# Altium PCB Tsal_PL.PcbDoc
Units mil, origin at the board's own origin, x right, y up, seen from the top; angles counter-clockwise.
Board outline 2297 x 1115 mil, 2 copper layers (Top Layer, Bottom Layer); 26 components, 21 nets, 58 pads, 5 vias.
Unrouted connection lines stored in the file: 13.
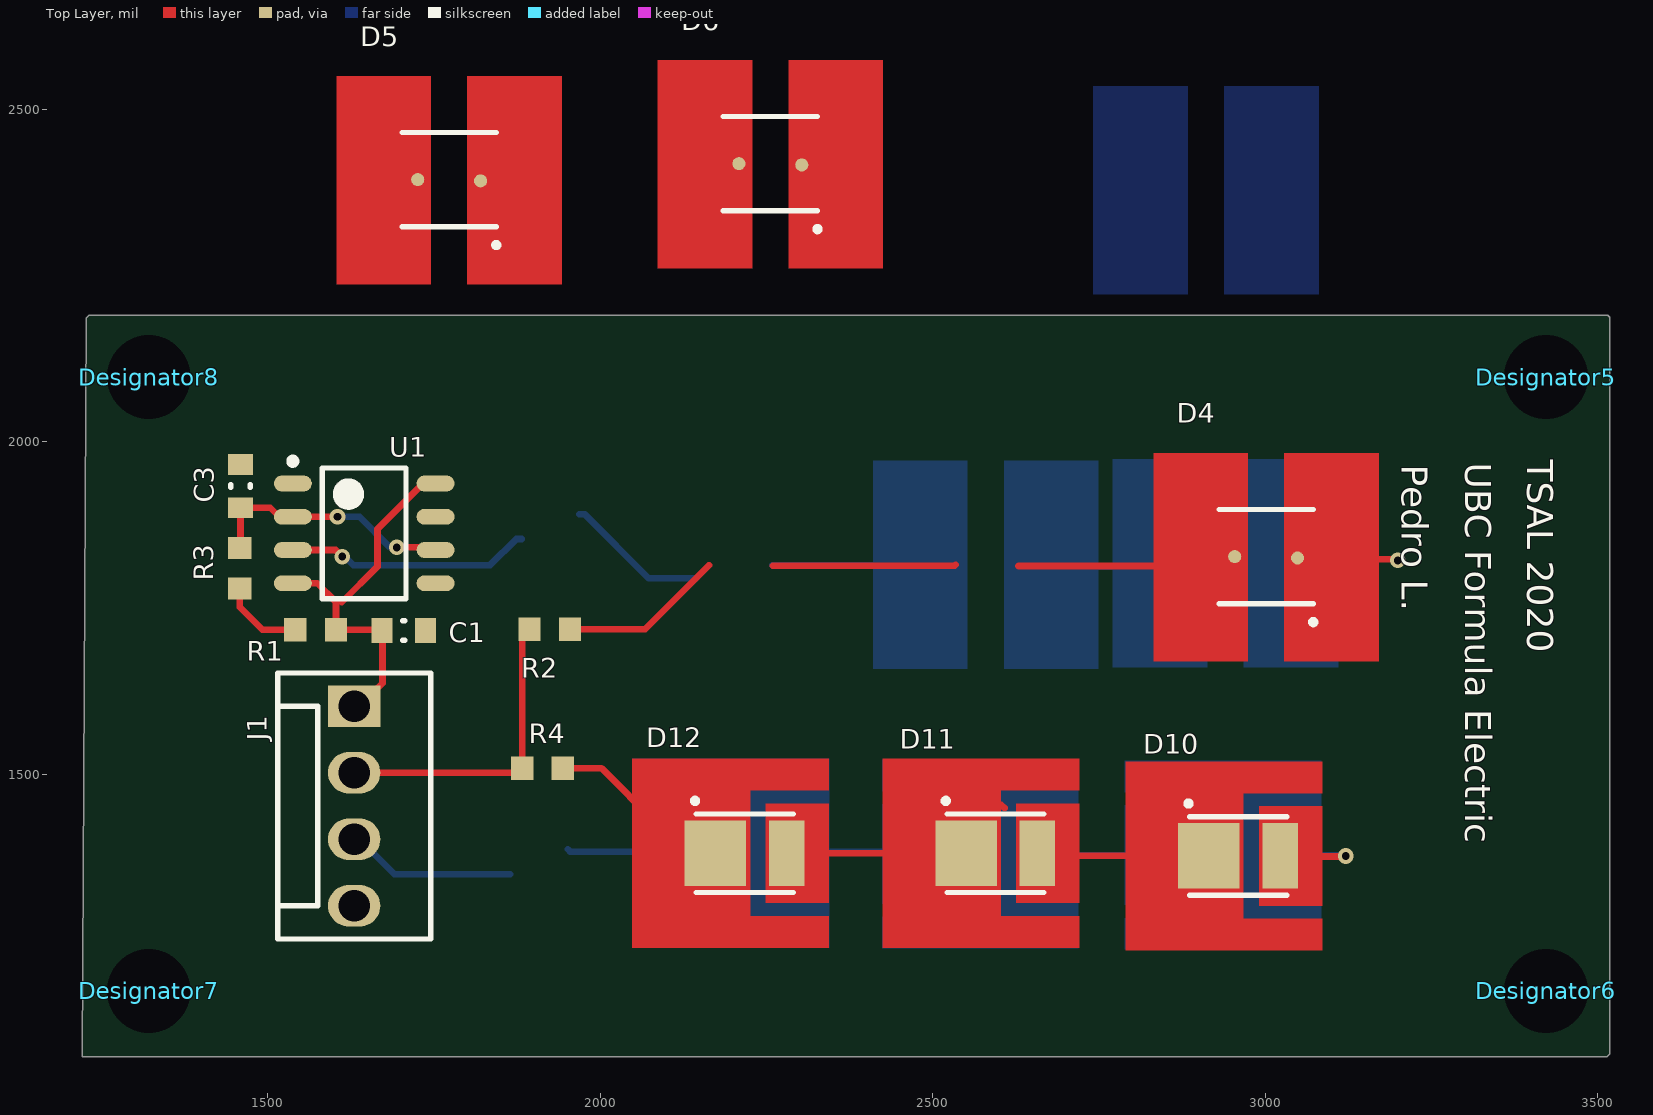
[diagram p0: Top Layer view]
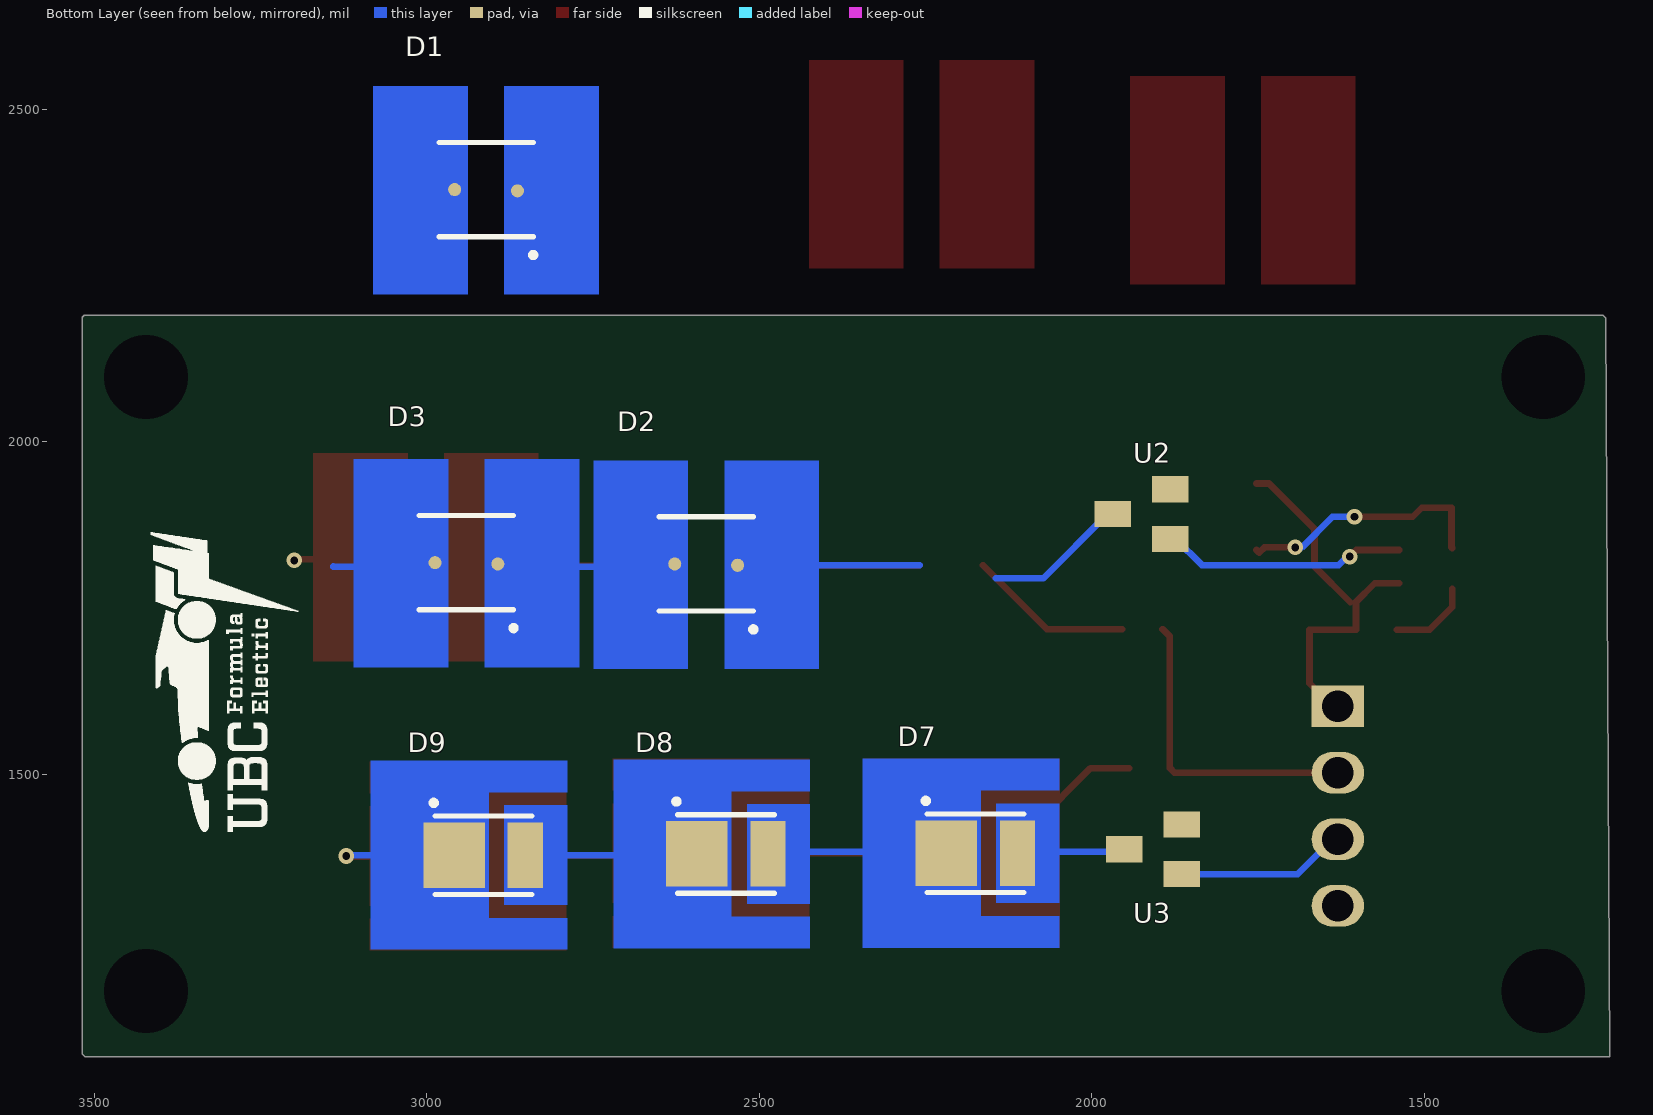
[diagram p1: Bottom Layer view, seen from below]

## Layer stack, top to bottom
Top Solder: solder mask 0.4, Solder Resist, Dk 3.5
Top Layer: signal copper 1.4
Dielectric 1: dielectric 12.6, FR-4, Dk 4.8
Bottom Layer: signal copper 1.4
Bottom Solder: solder mask 0.4, Solder Resist, Dk 3.5

## Board outline
1227,2186 1231,2190 3515,2190 3518,2187 3518,1079 3514,1075 1221,1075

## Design rules (kind name [scope] priority, off if disabled: settings)
Clearance [All] p1: gap=10 ignorepadtopadclearanceinfootprint=FALSE except(0: Arc-Hole Track-Hole SMDPad-Hole THPad-Hole Via-Hole Fill-Hole Poly-Hole Region-Hole Text-Hole)
PolygonConnect [All] p1: connectstyle=Relief reliefconductorwidth=10 reliefentries=4 polygonreliefangle="90 Angle" airgapwidth=10
RoutingVias [All] p1: holewidth=28 width=50 viastyle="Through Hole" minholewidth=28 minwidth=50 maxholewidth=28 maxwidth=50
SolderMaskExpansion [All] p1: expansion=4 istentingtop=FALSE
Width [All] p1: maxlimit=10 minlimit=10 preferedwidth=10
30 further rules are at their usual default settings.

## Classes and differential pairs
component class TSAL_PL: C1 C3 D1 D2 D3 D4 D5 D6 D7 D8 D9 D10 D11 D12 J1 R1 R2 R3 R4 U1 U2 U3

## Components (designator, comment, footprint, x,y, rotation, side; value= is the part's Value field where it differs from the comment)
C1 "0603" "0603 CAPACITOR (TDK C-SERIES)" 1704.52,1716 r0 top
C3 "0603" "0603 CAPACITOR (TDK C-SERIES)" 1459,1933 r90 top
D1 "RED" "RED LED" 2910.76,2379 r270 bottom
D2 "RED" "RED LED" 2579.76,1816 r270 bottom
D3 "RED" "RED LED" 2940.24,1817.97 r270 bottom
D4 "RED" "RED LED" 3001.24,1827 r270 top
D5 "RED" "RED LED" 1772.76,2393.97 r270 top
D6 "RED" "RED LED" 2255.76,2417.97 r270 top
D7 "GREEN" "GREEN LED" 2210.14,1381 r0 bottom
D8 "GREEN" "GREEN LED" 2585.14,1380 r0 bottom
D9 "GREEN" "GREEN LED" 2950,1378 r0 bottom
D10 "GREEN" "GREEN LED" 2923.86,1377 r180 top
D11 "GREEN" "GREEN LED" 2558.86,1381 r180 top
D12 "GREEN" "GREEN LED" 2181.86,1381 r180 top
Designator5 "Comment" "M3 Mounting Holes"#1 3422,2097 r0 top
Designator6 "Comment" "M3 Mounting Holes"#2 3423,1174 r0 top
Designator7 "Comment" "M3 Mounting Holes"#3 1303,1159 r0 top
Designator8 "Comment" "M3 Mounting Holes"#4 1321,2106 r0 top
J1 "1x4 Header" HDR1x4 1630,1452 r0 top
R1 "0603" "0603 RESISTOR (YAGEO)" 1572,1717 r0 top
R2 "0603" "0603 RESISTOR (YAGEO)" 1924,1718 r180 top
R3 "0603" "0603 RESISTOR (YAGEO)" 1458,1809.49 r270 top
R4 "0603" "0603 RESISTOR (YAGEO)" 1913,1509 r180 top
U1 "555" SOIC-8 1645,1862 r0 top
U2 "2N7002ET1G" 2N7002ET1G 1925,1891 r90 bottom
U3 "2N7002ET1G" 2N7002ET1G 1908,1387 r90 bottom

## Footprints (in the part's own frame and the unit in brackets; to place one, negate y for a bottom-side part, rotate by r counter-clockwise, add the part's x,y. Pads: shape width x height; smd on the part's side, far side on the other; paste and mask are expansions set on the pad)
2N7002ET1G [mm]
  rect 1x1.4 smd: 1(-0.95,-1.1) 2(0.95,-1.1) 3(0,1.1)
  body extent -1.5,-1.4 1.55,1.24, height 1.12
"0603 CAPACITOR (TDK C-SERIES)" [mm] "Chip Capacitor, 2-Leads, Body 1.60x0.80mm, IPC Medium Density"
  rect 0.8x0.95 smd: 1(-0.825,0) 2(0.825,0)
  silkscreen extent -0.05,-0.38 0.05,0.38, body extent -0.85,-0.45 0.85,0.45, height 0.9
"0603 RESISTOR (YAGEO)" [mm] "Chip Resistor, 2-Leads, Body 1.60x0.80mm, IPC Medium Density"
  rect 0.85x0.9 smd: 1(-0.775,0) 2(0.775,0)
  body extent -0.85,-0.45 0.85,0.45, height 0.55
"GREEN LED" [mm]
  rect 1.35x2.5 smd: 1(-2.5,0)
  rect 2.35x2.5 smd: 2(0.225,0)
  Top Layer region: -4.1,-1.9 -1.7,-1.9 -1.7,-1.25 -1.7,1.25 -1.7,1.9 -4.1,1.9
  Top Layer region: -4.1,-3.6 -4.1,-2.4 -1.1,-2.4 -1.1,-1.25 -1.1,1.25 -1.1,2.4 -4.1,2.4 -4.1,3.6 3.4,3.6 3.4,-3.6
  silkscreen extent -2.75,-2.07 1.07,1.5, body extent -2.65,-1.35 0.85,1.45, height 0.81
HDR1x4 [mm]
  rect 2x1.6 hole 1.2: 1(0,3.81)
  oval 2x1.6 hole 1.2: 2(0,1.27) 3(0,-1.27) 4(0,-3.81)
  silkscreen extent -2.92,-5.08 2.92,5.08, body extent -2.9,-5.08 2.9,5.08, height 11.07
"M3 Mounting Holes"#1 [mm] "No plating mechanical mounting holes"
  rect 0.3x1.3 hole 3.2 unplated: 15(0,0)
"M3 Mounting Holes"#2 [mm] "No plating mechanical mounting holes"
  rect 0.3x1.3 hole 3.2 unplated: 15(-0.025,0)
"M3 Mounting Holes"#3 [mm] "No plating mechanical mounting holes"
  rect 0.3x1.3 hole 3.2 unplated: 15(0.457,0.381)
"M3 Mounting Holes"#4 [mm] "No plating mechanical mounting holes"
  rect 0.3x1.3 hole 3.2 unplated: 15(0,-0.229)
"RED LED" [mm]
  round 0.5 smd: 1(0.05,1.2) 2(0,-1.2)
  Top Layer region: -1.4,0.7 -1.4,1.7 -0.5,1.7 -0.5,2.5 0.5,2.5 0.5,1.7 1.4,1.7 1.4,0.7
  Top Layer region: -1.4,-0.7 -1.4,-1.7 -0.5,-1.7 -0.5,-2.5 0.5,-2.5 0.5,-1.7 1.4,-1.7 1.4,-0.7
  Top Layer region: 4,-0.7 4,-4.3 -3.95,-4.3 -3.95,-0.7
  Top Layer region: 4,0.7 4,4.3 -3.95,4.3 -3.95,0.7
  silkscreen extent -1.8,-1.8 2.57,1.87, body extent -1.8,-1.86 1.7,1.76, height 1.26
SOIC-8 [mm] "SOIC, 8-Leads, Body 4.91x3.90mm, Pitch 1.27mm, IPC Medium Density"
  oval 1.45x0.6 smd: 1(-2.725,1.905) 2(-2.725,0.635) 3(-2.725,-0.635) 4(-2.725,-1.905) 5(2.725,-1.905) 6(2.725,-0.635) 7(2.725,0.635) 8(2.725,1.905)
  silkscreen extent -2.85,-2.5 1.6,2.88, body extent -3,-2.5 3,2.5, height 1.75

## Part data
C1: library part CL10B103KB8NNNC, "Cap Ceramic 0.01uF 50VDC X7R 10% SMD 0603 Paper T/R", Capacitance=10nF, Case Code (Metric)=1608, Dielectric=X7R, Manufacturer=Samsung, Max Operating Temperature=125°C, Min Operating Temperature=-55°C, Package Quantity=1, Supplier Part Number 1=1276-1009-1-ND, Tolerance=10%, Voltage=50V, Case Code (Imperial)=0603, Case/Package=0603, Category="Ceramic Capacitors", ComponentLink1Description=https://datasheet.ciiva.com/15195/getdatasheetpartid-357415-15195721.pdf?src-supplier=Verical, ComponentLink1URL=https://datasheet.ciiva.com/15195/getdatasheetpartid-357415-15195721.pdf?src-supplier=Verical, ComponentLink2Description=https://datasheet.ciiva.com/29198/457455-da-01-en-vs-kondensator-0603-29198644.pdf?src-supplier=Conrad, ComponentLink2URL=https://datasheet.ciiva.com/29198/457455-da-01-en-vs-kondensator-0603-29198644.pdf?src-supplier=Conrad, ComponentLink3Description=https://datasheet.ciiva.com/20173/71-0315-20173334.pdf?src-supplier=Rapid+Electronics, ComponentLink3URL=https://datasheet.ciiva.com/20173/71-0315-20173334.pdf?src-supplier=Rapid+Electronics, Contact Plating=Tin, Depth=0.8mm, Height=0.8mm, Lead Free="Lead Free", Length=1.6mm, Manufacturer Part Number=CL10B103KB8NNNC, Material=Ceramic, Mount="Surface Mount", Packaging="Tape and Reel", Pricing 1="1=0.10000, 10=0.02700, 50=0.01480, 100=0.01210, 500=0.00866, 1000=0.00681 (USD)", Radiation Hardening=No, RoHS=Yes, Stock 1=3003971, Supplier 1=Digi-Key, Thickness=0.035inch, Voltage Rating=50V, Voltage Rating (DC)=50V, Width=0.031inch
C3: library part UMK107ABJ105KAHT, "CAP ,MLCC ,0603,50V ,X5R,1uF 10% ,T&R", Capacitance=1uF, Case Code (Metric)=1608, Dielectric=X5R, Manufacturer="Taiyo Yuden", Max Operating Temperature=85°C, Min Operating Temperature=-55°C, Package Quantity=4000, Ratings=AEC-Q200, Supplier Part Number 1=587-3501-1-ND, Tolerance=10%, Voltage Rating=50V, Case Code (Imperial)=0603, Case/Package=0603, Category="Ceramic Capacitors", ComponentLink1Description=https://datasheet.ciiva.com/18697/mlcc01-hq-e-18697528.pdf?src-supplier=Digi-Key, ComponentLink1URL=https://datasheet.ciiva.com/18697/mlcc01-hq-e-18697528.pdf?src-supplier=Digi-Key, ComponentLink2Description=https://datasheet.ciiva.com/18697/mlcc01-hq-e-18697529.pdf?src-supplier=Digi-Key, ComponentLink2URL=https://datasheet.ciiva.com/18697/mlcc01-hq-e-18697529.pdf?src-supplier=Digi-Key, ComponentLink3Description=https://datasheet.ciiva.com/18697/mlcc01-hq-e-18697530.pdf?src-supplier=Digi-Key, ComponentLink3URL=https://datasheet.ciiva.com/18697/mlcc01-hq-e-18697530.pdf?src-supplier=Digi-Key, Halogen Free="Halogen Free", Height=0.8mm, Lead Free="Lead Free", Length=0.063inch, Manufacturer Part Number=UMK107ABJ105KAHT, Mount="Surface Mount", Packaging="Tape and Reel", Pricing 1="1=0.18000, 10=0.12600, 50=0.07560, 100=0.06380, 500=0.04368, 1000=0.03864 (USD)", RoHS=Yes, Stock 1=36801, Supplier 1=Digi-Key, Termination=SMD/SMT, Thickness=0.035inch, Voltage Rating (DC)=50V, Width=0.8mm
D1 D2 D3 D4 D5 D6: library part OVS5MRBCR4, "LED 0.33W RED WTR CLR 3.5MM", Case/Package=SMD/SMT, Color=Red, Forward Current=200mA, Forward Voltage=2.2V, Manufacturer="TT Optek", Max Operating Temperature=100°C, Max Power Dissipation=330mW, Min Operating Temperature=-40°C, Package Quantity=1, Power Dissipation=750mW, Power Rating=500mW, Reverse Voltage=12V, Supplier Part Number 1=365-1546-1-ND, Test Current=150mA, Category=LEDs, ComponentLink1Description=https://datasheet.ciiva.com/2126/ovs5mabcr4-2126832.pdf?src-supplier=Digi-Key, ComponentLink1URL=https://datasheet.ciiva.com/2126/ovs5mabcr4-2126832.pdf?src-supplier=Digi-Key, ComponentLink2Description=https://datasheet.ciiva.com/16224/ovs5mrbcr4-16224208.pdf?src-supplier=Future+Electronics, ComponentLink2URL=https://datasheet.ciiva.com/16224/ovs5mrbcr4-16224208.pdf?src-supplier=Future+Electronics, ComponentLink3Description=https://datasheet.ciiva.com/2126/ovs5mabcr4-2126833.pdf?src-supplier=Digi-Key, ComponentLink3URL=https://datasheet.ciiva.com/2126/ovs5mabcr4-2126833.pdf?src-supplier=Digi-Key, ComponentLink4Description=https://datasheet.ciiva.com/46403/ovs5mabcr4-46403613.pdf?src-supplier=Element14, ComponentLink4URL=https://datasheet.ciiva.com/46403/ovs5mabcr4-46403613.pdf?src-supplier=Element14, ComponentLink5Description=https://datasheet.ciiva.com/2126/ovs5mabcr4-2126831.pdf?src-supplier=Digi-Key, ComponentLink5URL=https://datasheet.ciiva.com/2126/ovs5mabcr4-2126831.pdf?src-supplier=Digi-Key, Depth=3.5mm, Dominant Wavelength=625nm, Illumination Color=Red, Lead Free="Lead Free", Length=3.5mm, Lens Style=Clear,Diffused,Colorless, Luminous Intensity=7150mcd, Manufacturer Part Number=OVS5MRBCR4, Max Current Rating=200mA, Mount="Surface Mount", Number of Elements=1, Number of Pins=2, Packaging="Tape and Reel", Pricing 1="1=0.96000, 100=0.92400, 250=0.88000, 500=0.85800 (USD)", REACH SVHC="No SVHC", RoHS=Yes, Stock 1=10132, Supplier 1=Digi-Key, Viewing Angle=120°, Wavelength=625nm
D7 D8 D9 D10 D11 D12: library part XZDG25X109FS, "Led 3.5X2.8 0.5W SMD Green", Case Code (Imperial)=1411, Case Code (Metric)=3528, Color=Green, Forward Voltage=3.5V, Lens Color=Colorless, Manufacturer=SunLED, Supplier Part Number 1=1497-1345-1-ND, Test Current=150mA, Case/Package=1411, Category=LEDs, ComponentLink1Description=http://www.sunledusa.com/products/spec/XZDG25X109FS.pdf?src-supplier=Digi-Key, ComponentLink1URL=http://www.sunledusa.com/products/spec/XZDG25X109FS.pdf?src-supplier=Digi-Key, ComponentLink2Description=https://www.sunledusa.com/products/spec/XZDG25X109FS.pdf?src-supplier=Digi-Key, ComponentLink2URL=https://www.sunledusa.com/products/spec/XZDG25X109FS.pdf?src-supplier=Digi-Key, Dominant Wavelength=525nm, Height=1.05mm, Length=3.5mm, Lens Size=2.5mm, Lens Style=Round,Flat, Lens Transparency=Clear, Luminous Intensity=6990mcd, Manufacturer Part Number=XZDG25X109FS, Mount="Surface Mount", Packaging="Cut Tape", Pricing 1="1=1.83000, 10=1.61300, 100=0.93630, 500=0.84640, 1000=0.72738 (USD)", RoHS=No, Stock 1=1496, Supplier 1=Digi-Key, Viewing Angle=120°, Width=2.8mm
J1: library part 22-27-2041, "Conn Wire to Board HDR 4 POS 2.54mm Solder ST Thru-Hole Bag", Color=Natural, Contact Resistance=10mR, Housing Color=White, Manufacturer=Molex, Max Operating Temperature=75°C, Min Operating Temperature=0°C, Supplier Part Number 1=WM4113-ND, Category="Headers and Wire Housings", ComponentLink1Description=https://datasheet.ciiva.com/6813/022272021-sd-6813678.pdf?src-supplier=Digi-Key, ComponentLink1URL=https://datasheet.ciiva.com/6813/022272021-sd-6813678.pdf?src-supplier=Digi-Key, ComponentLink2Description=https://datasheet.ciiva.com/7844/1625756-7844114.pdf?src-supplier=Element14, ComponentLink2URL=https://datasheet.ciiva.com/7844/1625756-7844114.pdf?src-supplier=Element14, ComponentLink3Description=https://datasheet.ciiva.com/11746/0900766b80462714-11746241.pdf?src-supplier=RSComponents, ComponentLink3URL=https://datasheet.ciiva.com/11746/0900766b80462714-11746241.pdf?src-supplier=RSComponents, ComponentLink4Description=https://datasheet.ciiva.com/20207/22-0838e-20207115.pdf?src-supplier=Rapid+Electronics, ComponentLink4URL=https://datasheet.ciiva.com/20207/22-0838e-20207115.pdf?src-supplier=Rapid+Electronics, ComponentLink5Description=https://datasheet.ciiva.com/15217/getdatasheetpartid-176661-15217685.pdf?src-supplier=Verical, ComponentLink5URL=https://datasheet.ciiva.com/15217/getdatasheetpartid-176661-15217685.pdf?src-supplier=Verical, ComponentLink6Description=https://datasheet.ciiva.com/49385/879300-49385686.pdf?src-supplier=Jameco, ComponentLink6URL=https://datasheet.ciiva.com/49385/879300-49385686.pdf?src-supplier=Jameco, Connector Type="Male Pin", Contact Material=Brass, Contact Mating Length=0.295inch, Contact Plating=Tin,Copper, Depth=5.8mm, Fastening Type=Friction, Gender=Male, Housing Material=Nylon, Length=10.16mm, Manufacturer Part Number=22-27-2041, Mount="Through Hole", Number of Contacts=4, Number of Positions=4, Number of Rows=1, Orientation=Straight, Packaging=Bulk, Pitch=2.54mm, Pricing 1="1=0.40000, 10=0.38300, 100=0.26800, 500=0.22974, 1000=0.19145, 5000=0.16410, 10000=0.15316 (USD)", RoHS=Yes, Stock 1=5089, Supplier 1=Digi-Key, Termination=Solder
R1: library part CRCW060322K0FKEAC, "Res Thick Film 0603 22K Ohm 1% 1/10W ±100ppm/°C Molded SMD Paper T/R", Case/Package=Molded, Manufacturer="Vishay Semiconductors", Max Operating Temperature=155°C, Min Operating Temperature=-55°C, Power Rating=100mW, Resistance=22k, Resistor Type="Thick Film", Supplier Part Number 1=541-4036-1-ND, Temperature Coefficient=100ppm/°C, Tolerance=1%, Category=Resistors, ComponentLink1Description=http://www.vishay.com/docs/28773/crcwce3.pdf?src-supplier=Digi-Key, ComponentLink1URL=http://www.vishay.com/docs/28773/crcwce3.pdf?src-supplier=Digi-Key, ComponentLink2Description=http://www.vishay.com/docs/20035/dcrcwe3.pdf?src-supplier=Avnet+Asia, ComponentLink2URL=http://www.vishay.com/docs/20035/dcrcwe3.pdf?src-supplier=Avnet+Asia, Contact Plating=Tin, Lead Free="Lead Free", Length=1.55mm, Manufacturer Part Number=CRCW060322K0FKEAC, Mount="Surface Mount", Pricing 1="1=0.10000, 10=0.03100, 100=0.01260, 1000=0.00567, 2500=0.00492 (USD)", RoHS=Yes, Stock 1=48223, Supplier 1=Digi-Key, Termination=Wraparound
R2: library part 2010, "TE CONNECTIVITY - CRGP2010F100R - RES, 100R, 1%, 1.25W, 2010, THICK FILM", Manufacturer="TE Connectivity", Manufacturer Part Number=CRGP2010F100R, Resistence=100, Supplier Part Number 1=A130648CT-ND, Category="Chip SMD Resistors", ComponentLink1Description=https://www.te.com/commerce/DocumentDelivery/DDEController?Action=srchrtrv&amp;DocNm=9-1773463-9&amp;DocType=DS&amp;DocLang=English&src-supplier=Digi-Key, ComponentLink1URL=https://www.te.com/commerce/DocumentDelivery/DDEController?Action=srchrtrv&amp;DocNm=9-1773463-9&amp;DocType=DS&amp;DocLang=English&src-supplier=Digi-Key, ComponentLink2Description=https://4donline.ihs.com/images/VipMasterIC/IC/TYEL/TYEL-S-A0005460475/TYEL-S-A0005460475-1.pdf?hkey=52A5661711E402568146F3353EA87419&src-supplier=Farnell, ComponentLink2URL=https://4donline.ihs.com/images/VipMasterIC/IC/TYEL/TYEL-S-A0005460475/TYEL-S-A0005460475-1.pdf?hkey=52A5661711E402568146F3353EA87419&src-supplier=Farnell, ComponentLink3Description=https://4donline.ihs.com/images/VipMasterIC/IC/TYEL/TYEL-S-A0005460475/TYEL-S-A0005460475-1.pdf?hkey=52A5661711E402568146F3353EA87419&src-supplier=Newark, ComponentLink3URL=https://4donline.ihs.com/images/VipMasterIC/IC/TYEL/TYEL-S-A0005460475/TYEL-S-A0005460475-1.pdf?hkey=52A5661711E402568146F3353EA87419&src-supplier=Newark, Pricing 1="1=0.37000, 10=0.28600, 100=0.12040, 1000=0.06643 (USD)", RoHS=No, Stock 1=14514, Supplier 1=Digi-Key
R3: library part CRCW0603200KFKEAC, "Res Thick Film 0603 200K Ohm 1% 1/10W ±100ppm/°C Molded SMD Paper T/R", Case/Package=Molded, Manufacturer=Vishay, Max Operating Temperature=155°C, Min Operating Temperature=-55°C, Power Rating=100mW, Resistance=200k, Resistor Type="Thick Film", Supplier Part Number 1=541-4027-1-ND, Temperature Coefficient=100ppm/°C, Tolerance=1%, Category=Resistors, ComponentLink1Description=http://www.vishay.com/docs/28773/crcwce3.pdf?src-supplier=Digi-Key, ComponentLink1URL=http://www.vishay.com/docs/28773/crcwce3.pdf?src-supplier=Digi-Key, Contact Plating=Tin, Lead Free="Lead Free", Length=1.55mm, Manufacturer Part Number=CRCW0603200KFKEAC, Mount="Surface Mount", Pricing 1="1=0.10000, 10=0.03100, 100=0.01260, 1000=0.00567, 2500=0.00492 (USD)", RoHS=Yes, Stock 1=12235, Supplier 1=Digi-Key, Termination=Wraparound
R4: library part RL1220S-270-F, "RES SMD 27 OHM 1% 1/3W 0805", Case/Package=0805, Manufacturer=Susumu, Package Quantity=5000, Resistance=27, Supplier Part Number 1=408-1396-1-ND, Category="Chip SMD Resistors", ComponentLink1Description=http://www.mouser.com/ds/2/392/RL_Data_sheet-263250.pdf?src-supplier=Mouser, ComponentLink1URL=http://www.mouser.com/ds/2/392/RL_Data_sheet-263250.pdf?src-supplier=Mouser, ComponentLink2Description=http://www.susumu.co.jp/common/pdf/n_catalog_partition08_en.pdf?src-supplier=Digi-Key, ComponentLink2URL=http://www.susumu.co.jp/common/pdf/n_catalog_partition08_en.pdf?src-supplier=Digi-Key, Height=0.4mm, Length=2mm, Manufacturer Part Number=RL1220S-270-F, Packaging="Tape and Reel", Pricing 1="1=0.34000, 10=0.28900, 25=0.21000, 50=0.15220, 100=0.11290, 250=0.08664, 500=0.06826, 1000=0.04725 (USD)", RoHS=Yes, Stock 1=2466, Supplier 1=Digi-Key, Termination=SMD/SMT, Weight=0.000194oz, Width=1.25mm
U1: library part SA555DRG4, "IC OSC SGL TIMER 100KHZ 8-SOIC", Case/Package=SOIC, Frequency=100kHz, High Level Output Current=-200mA, Low Level Output Current=200mA, Manufacturer="Texas Instruments", Max Operating Temperature=85°C, Max Supply Voltage=16V, Min Operating Temperature=-40°C, Min Supply Voltage=4.5V, Nominal Supply Current=2mA, Operating Supply Current=10mA, Package Quantity=2500, Quiescent Current=15mA, Supplier Part Number 1=296-48948-1-ND, Category="Timers and Oscillators", ComponentLink1Description=https://datasheet.ciiva.com/26943/getdatasheetpartid-624446-26943897.pdf?src-supplier=Verical, ComponentLink1URL=https://datasheet.ciiva.com/26943/getdatasheetpartid-624446-26943897.pdf?src-supplier=Verical, ComponentLink2Description=https://datasheet.ciiva.com/1235/sa555-1235928.pdf?src-supplier=Digi-Key, ComponentLink2URL=https://datasheet.ciiva.com/1235/sa555-1235928.pdf?src-supplier=Digi-Key, ComponentLink3Description=https://datasheet.ciiva.com/14274/se555m-14274518.pdf?src-supplier=Avnet, ComponentLink3URL=https://datasheet.ciiva.com/14274/se555m-14274518.pdf?src-supplier=Avnet, Lead Free="Lead Free", Manufacturer Part Number=SA555DRG4, Mount="Surface Mount", Number of Pins=8, Number of Timers/Counters=1, Packaging="Tape and Reel", Pricing 1="1=0.39000, 10=0.31500, 25=0.28800, 100=0.21440, 250=0.19432, 500=0.16080, 1000=0.12060 (USD)", Radiation Hardening=No, RoHS=Yes, Stock 1=1131, Supplier 1=Digi-Key, Weight=0.002561oz
U2 U3: "Trans MOSFET N-CH 60V 0.26A 3-Pin SOT-23 T/R", Case/Package=SOT-23-3, Continuous Drain Current (ID)=260mA, Drain to Source Breakdown Voltage=60V, Drain to Source Resistance=2.5R, Gate to Source Voltage (Vgs)=20V, Input Capacitance=26.7pF, Manufacturer="ON Semiconductor", Max Operating Temperature=150°C, Max Power Dissipation=300mW, Min Operating Temperature=-55°C, Package Quantity=3000, Supplier Part Number 1=2N7002ET1GOSCT-ND, Threshold Voltage=1V, Category=MOSFETs, ComponentLink1Description=https://datasheet.ciiva.com/936/2n7002e-d-936787.pdf?src-supplier=Digi-Key, ComponentLink1URL=https://datasheet.ciiva.com/936/2n7002e-d-936787.pdf?src-supplier=Digi-Key, ComponentLink2Description=https://datasheet.ciiva.com/8059/2n7002e-d-8059427.pdf?src-supplier=Element14, ComponentLink2URL=https://datasheet.ciiva.com/8059/2n7002e-d-8059427.pdf?src-supplier=Element14, ComponentLink3Description=https://datasheet.ciiva.com/13060/2n7002e-d-105476-13060091.pdf?src-supplier=Mouser, ComponentLink3URL=https://datasheet.ciiva.com/13060/2n7002e-d-105476-13060091.pdf?src-supplier=Mouser, ComponentLink4Description=https://datasheet.ciiva.com/26146/2n7002e-d-26146200.pdf?src-supplier=Avnet+Europe, ComponentLink4URL=https://datasheet.ciiva.com/26146/2n7002e-d-26146200.pdf?src-supplier=Avnet+Europe, ComponentLink5Description=https://datasheet.ciiva.com/49018/70339334-49018202.pdf?src-supplier=Allied+Electronics, ComponentLink5URL=https://datasheet.ciiva.com/49018/70339334-49018202.pdf?src-supplier=Allied+Electronics, ComponentLink6Description=https://datasheet.ciiva.com/22641/1708226-22641627.pdf?src-supplier=Element14, ComponentLink6URL=https://datasheet.ciiva.com/22641/1708226-22641627.pdf?src-supplier=Element14, ComponentLink7Description=https://datasheet.ciiva.com/22641/1708226-22641628.pdf?src-supplier=Element14, ComponentLink7URL=https://datasheet.ciiva.com/22641/1708226-22641628.pdf?src-supplier=Element14, ComponentLink8Description=https://datasheet.ciiva.com/936/2n7002e-d-936788.pdf?src-supplier=Digi-Key, ComponentLink8URL=https://datasheet.ciiva.com/936/2n7002e-d-936788.pdf?src-supplier=Digi-Key, ComponentLink9Description=https://datasheet.ciiva.com/936/2n7002e-d-936789.pdf?src-supplier=Digi-Key, ComponentLink9URL=https://datasheet.ciiva.com/936/2n7002e-d-936789.pdf?src-supplier=Digi-Key, ComponentLink10Description=https://datasheet.ciiva.com/3304/2n7002e-d-3304389.pdf?src-supplier=Avnet, ComponentLink10URL=https://datasheet.ciiva.com/3304/2n7002e-d-3304389.pdf?src-supplier=Avnet, ComponentLink11Description=https://datasheet.ciiva.com/3304/2n7002e-d-3304390.pdf?src-supplier=Avnet, ComponentLink11URL=https://datasheet.ciiva.com/3304/2n7002e-d-3304390.pdf?src-supplier=Avnet, ComponentLink12Description=https://datasheet.ciiva.com/15198/getdatasheetpartid-53846-15198758.pdf?src-supplier=Verical, ComponentLink12URL=https://datasheet.ciiva.com/15198/getdatasheetpartid-53846-15198758.pdf?src-supplier=Verical, ComponentLink13Description=https://datasheet.ciiva.com/16305/2n7002e-d-16305452.pdf?src-supplier=Future+Electronics, ComponentLink13URL=https://datasheet.ciiva.com/16305/2n7002e-d-16305452.pdf?src-supplier=Future+Electronics, Element Configuration=Single, Fall Time=1.2ns, Halogen Free="Halogen Free", Height=0.94mm, Lead Free="Lead Free", Length=2.9mm, Manufacturer Part Number=2N7002ET1G, Nominal Vgs=1V, Number of Elements=1, Number of Pins=3, On-State Resistance=2.5R, Packaging="Tape and Reel", Power Dissipation=300mW, Pricing 1="1=0.18000, 10=0.16300, 25=0.15520, 100=0.06820, 500=0.05356, 1000=0.03720 (USD)", Radiation Hardening=No, Rds On Max=2.5R, REACH SVHC="No SVHC", Rise Time=1.2ns, RoHS=Yes, Stock 1=151215, Supplier 1=Digi-Key, Turn-Off Delay Time=4.8ns, Turn-On Delay Time=1.7ns, Width=1.3mm

## Via types
v1: diameter 23.62, hole 11.81, Top Layer to Bottom Layer, 5 vias

## Nets (pads, with @x,y where several pads share a name; then routed paths per layer and width w, separated by ;. In a path a pad name is that pad's centre, name@x,y a point inside that pad or via, vN(x,y) a via of type N, cw(c..) or ccw(c..) an arc to the next point about the centre after c; other vN are vias at no path point)
+24V: J1.2 R2.2 R4.2 | length 468.9
  Top Layer w10: J1.2 1875.49,1502 R4.2 1882.49,1707 R2.2
DISCH: R1.1 R3.2 U1.7 | length 125.5
  Top Layer w10: R3.2 1458,1751 1492,1717 R1.1
GND: C1.2 C3.2 J1.4 U1.1 U2.2 U3.2
GREEN_IN: J1.3 U3.1 | length 256.4
  Bottom Layer w10: J1.3 1637.87,1402 1690.28,1349.6 U3.1
NetD1_1: D1.1 U2.3 | length 216.1
  Bottom Layer w10: U2.3 1976.18,1891 2072.9,1794.28 2144.32,1794.28
NetD1_2: D1.2 D2.1 | length 274
  Bottom Layer w10: 2258.52,1814 D2.1
NetD2_2: D2.2 D3.1 | length 230.9
  Bottom Layer w10: D2.2 2628.85,1814.15 2635.55,1814.15 2637.7,1812 2856.21,1812
NetD3_2: D3.2 D4.1 | length 303.7
  Top Layer w10: D4.1 3050.34,1823.18 3197.28,1823.18 v1(3199.07,1821.39)
  Bottom Layer w10: D3.2@2989.55,1812.97 2990.54,1811.98 3140.26,1811.98 3140.64,1812.36
NetD4_2: D4.2 D5.1 | length 268.6
  Top Layer w10: 2629,1813 2887.99,1813 2892.95,1817.97 2895.57,1817.97
NetD5_2: D5.2 D6.1 | length 277.7
  Top Layer w10: 2259.55,1813.48 2533.03,1813.48 2534.51,1814.97 ; D6.1@2301.52,2414.52 D6.1
NetD6_2: D6.2 R2.1 | length 248.8
  Top Layer w10: R2.1 2067.61,1718 2163.57,1813.97
NetD7_1: D7.1 U3.3 | length 162.9
  Bottom Layer w10: U3.3 1955.31,1383 2109.72,1383 D7.1
NetD7_2: D7.2 D8.1 | length 269.8
  Bottom Layer w10: D7.2 2221,1383 2483.72,1383 D8.1
NetD8_2: D8.2 D9.1 | length 258.4
  Bottom Layer w10: D8.2 2596,1378 D9.1
NetD9_2: D9.2 D10.1 | length 271.8
  Top Layer w10: D10.1 3019,1377 3018,1376 3120,1376 v1(3120.88,1376.88)
  Bottom Layer w10: D9.2 3119.75,1378 v1(3120.88,1376.88) ; 3022,1447 3023,1448
NetD10_2: D10.2 D11.1 | length 259.4
  Top Layer w10: D11.1 2661.28,1377 D10.2
NetD11_2: D11.2 D12.1 | length 276.8
  Top Layer w10: D12.1 D11.2 ; 2603,1454 2608,1449
NetD12_2: D12.2 R4.1 | length 288.9
  Top Layer w10: R4.1 2001.6,1509 2085.39,1425.21 2131.74,1425.21 2154,1402.95 2154,1392 2165,1381 D12.2
OUT: U1.3 U2.1 | length 369.7
  Top Layer w10: U1.3 1602,1837 v1(1612,1827)
  Bottom Layer w10: v1(1612,1827) 1615.69,1827 1628.5,1814.19 1834.41,1814.19 1873.82,1853.6 U2.1
RED_IN: C1.1 J1.1 R1.2 U1.4 U1.8 | length 573.7
  Top Layer w10: U1.4 1574.43,1787 1602.51,1758.92 R1.2 1672.52,1717 1672.52,1636.65 1637.87,1602 J1.1 ; 1611.34,1758.34 1665,1812 1665,1868.57 1733.43,1937 U1.8
TRIG: C3.1 R3.1 U1.2 U1.6 | length 383.8
  Top Layer w10: R3.1 1459,1841 C3.1 1503.78,1900.52 1517.3,1887 U1.2 v1(1605,1887) ; v1(1694,1841) 1740.28,1841 1748.28,1833 U1.6
  Bottom Layer w10: v1(1605,1887) 1638,1887 1684,1841 v1(1694,1841)
pads on no net: Designator5.15 Designator6.15 Designator7.15 Designator8.15 U1.5

## Silkscreen, mask and mechanical layers (free items; w line width, h text height)
Top Overlay:
  text "TSAL 2020" at 3394,1973 h39.37 r270
  text "UBC Formula Electric" at 3301,1968 h39.37 r270
  text "Pedro L." at 3205,1965 h39.37 r270
Bottom Overlay:
  drawing of 2532 lines, arcs and shapes, not listed
Mechanical 1:
  the board outline again, w19.68